# Altium PCB BoostConverter.PcbDoc
Units mil, origin at the board's own origin, x right, y up, seen from the top; angles counter-clockwise.
Board outline 1455 x 1730 mil, 2 copper layers (Top Layer, Bottom Layer); 21 components, 14 nets, 73 pads, 0 vias.
Unrouted connection lines stored in the file: 15.
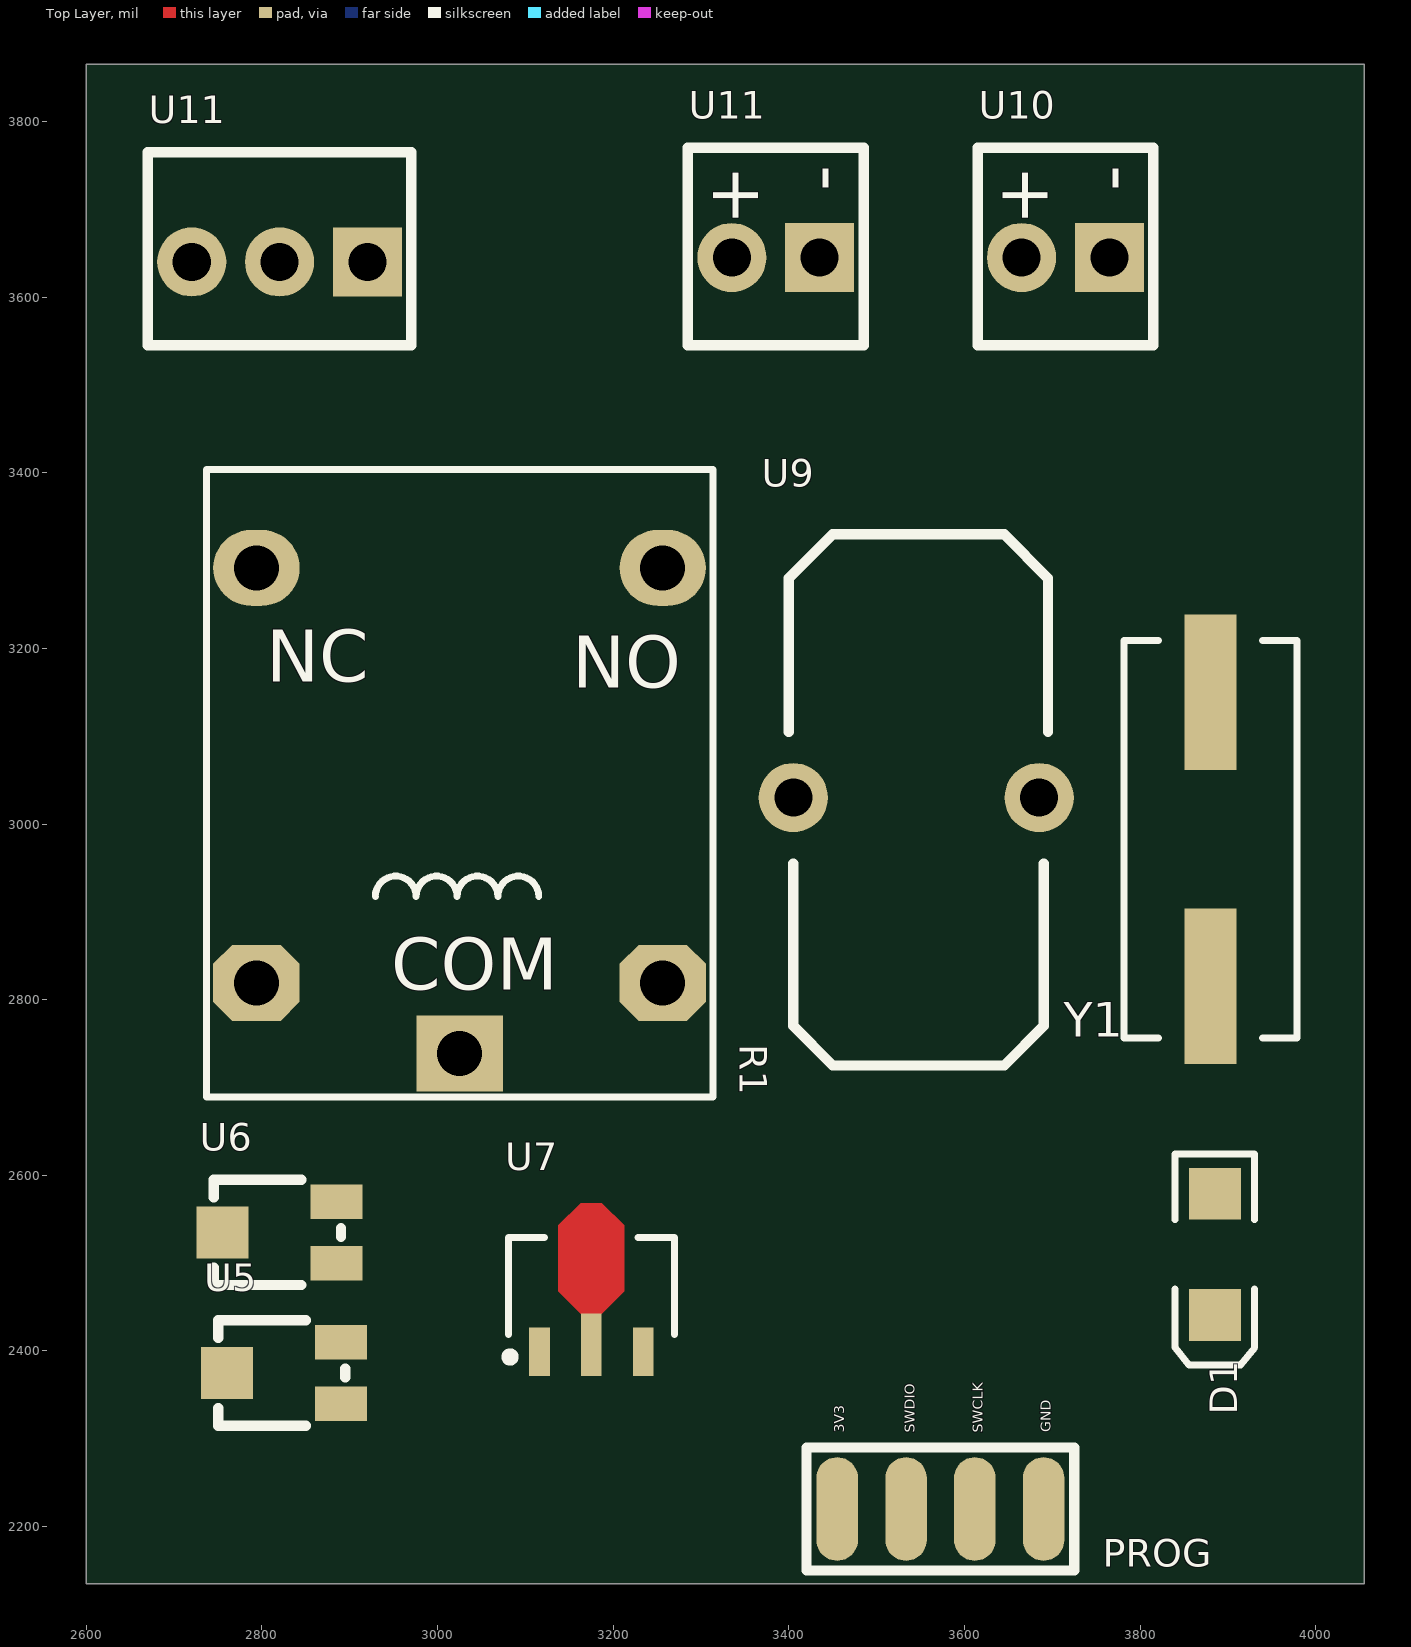
[diagram p0: Top Layer view]
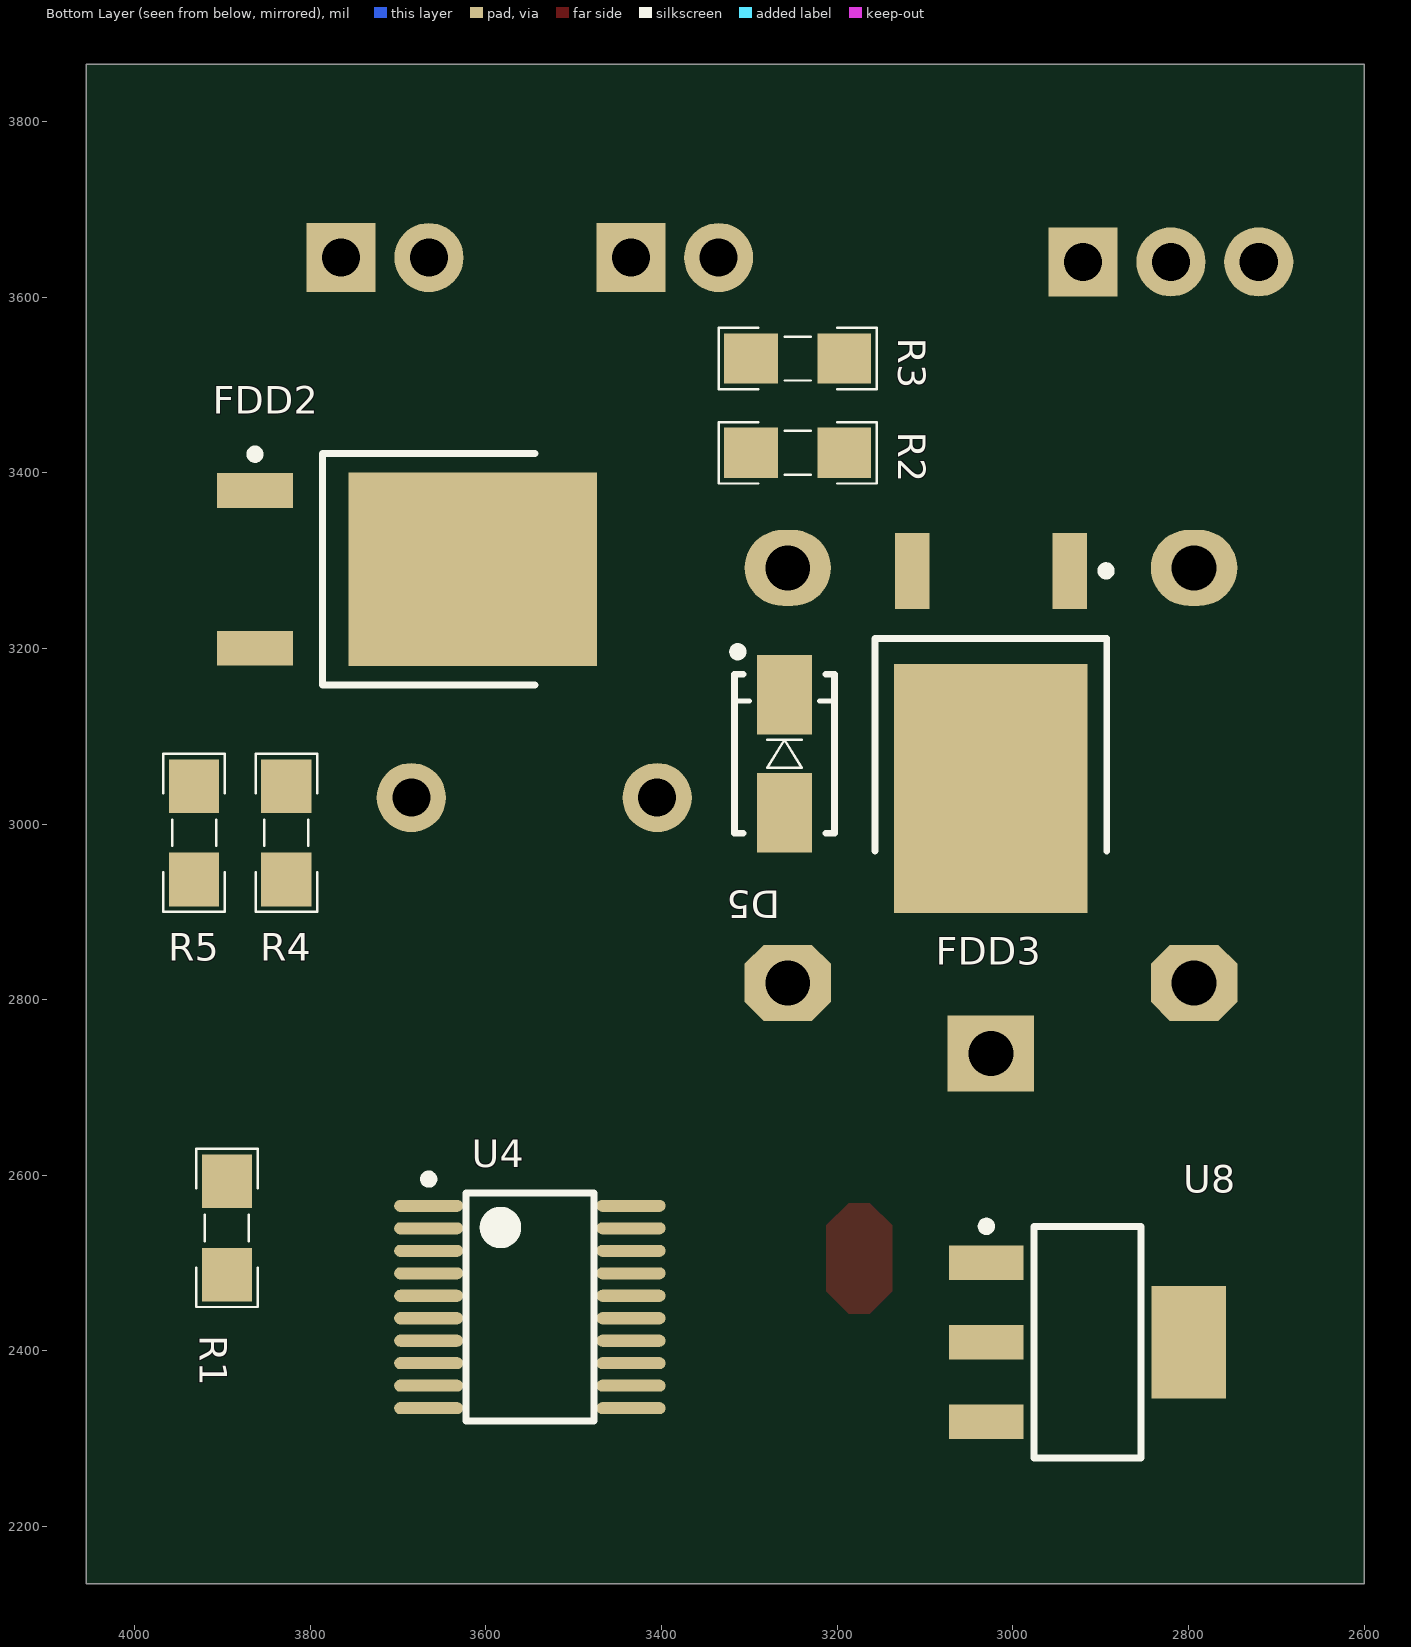
[diagram p1: Bottom Layer view, seen from below]

## Layer stack, top to bottom
Top Solder: solder mask 0.4, Solder Resist, Dk 3.5
Top Layer: signal copper 1.4
Dielectric 1: dielectric 12.6, FR-4, Dk 4.8
Bottom Layer: signal copper 1.4
Bottom Solder: solder mask 0.4, Solder Resist, Dk 3.5

## Board outline
2600,2135 2600,3865 4055,3865 4055,2135

## Design rules (kind name [scope] priority, off if disabled: settings)
Clearance [All] p1: gap=10 ignorepadtopadclearanceinfootprint=FALSE except(0: Arc-Hole Track-Hole SMDPad-Hole THPad-Hole Via-Hole Fill-Hole Poly-Hole Region-Hole Text-Hole)
ComponentClearance [All] p1 off: gap=10 collisioncheckmode=3 verticalgap=10 showdistances=FALSE
Height [All] p1 off: minheight=0 maxheight=1000 prefheight=500
PolygonConnect [All] p1: connectstyle=Relief reliefconductorwidth=10 reliefentries=4 polygonreliefangle="90 Angle" airgapwidth=10
RoutingVias [All] p1: holewidth=28 width=50 viastyle="Through Hole" minholewidth=28 minwidth=50 maxholewidth=28 maxwidth=50
SolderMaskExpansion [All] p1: expansion=4 istentingtop=FALSE
Width [All] p1: maxlimit=10 minlimit=10 preferedwidth=10
28 further rules are at their usual default settings.

## Components (designator, comment, footprint, x,y, rotation, side; value= is the part's Value field where it differs from the comment)
D1 "SMD 1206 LED" "LED 1206" 3885,2510 r270 top (schematic designator D2)
D5 "1n4007" DIOM4629X24N 3260,3080 r90 bottom (schematic designator D3)
FDD2 "Comment" TO252-3M 3689.8,3290 r180 bottom
FDD3 "Comment" TO252-3M 3025,3115 r270 bottom
PROG "Comment" PROGRAMER 3575,2220 r0 top
R1 "1K" RESC3413X04N 3895,2540 r90 bottom (schematic designator R22)
R1 "Comment" "Relay 18.85x15.35x15.70" 3025,3015 r0 top
R2 "Comment" RESC3413X04N 3245,3422.68 r0 bottom
R3 "Comment" RESC3413X04N 3245,3530 r0 bottom
R4 "Comment" RESC3413X04N 3827.32,2990 r270 bottom
R5 "Comment" RESC3413X04N 3932.32,2990 r270 bottom
U4 "Comment" STM32F030F4P6 3550,2450 r180 bottom
U5 "Comment" potentiometer 2820,2375 r90 top
U6 "Comment" potentiometer 2815,2535 r90 top
U7 "Comment" "7805 (SOT-89)" 3175,2470 r90 top
U8 "Comment" AMS1117 2915,2410 r180 bottom
U9 "Comment" inductor 3545,3035 r0 top
U10 "Comment" "H2 MOLEX" 3715,3660 r90 top
U11 "Comment" "H3 MOLEX" 2820,3640 r180 top
U11 "Comment" "H2 MOLEX" 3385,3660 r90 top
Y1 "12 MHz" "Crystal SMD" 3880,2982.68 r90 top

## Footprints (in the part's own frame and the unit in brackets; to place one, negate y for a bottom-side part, rotate by r counter-clockwise, add the part's x,y. Pads: shape width x height; smd on the part's side, far side on the other; paste and mask are expansions set on the pad)
"7805 (SOT-89)" [mm] "SOT89, 3-Leads, Body 4.50x2.45mm, Pitch 1.50mm, Lead Span 4.1mm, IPC Medium Density"
  rect 1.4x0.6 smd: 1(-1.8,1.5) 3(-1.8,-1.5)
  rect 1.8x0.6 smd: 2(-1.6,0)
  Top Layer region: -0.7,0.3 -0.05,0.95 1.85,0.95 2.5,0.3 2.5,-0.3 1.85,-0.95 -0.05,-0.95 -0.7,-0.3
  silkscreen extent -2.08,-2.4 1.5,2.47, body extent -2.27,-2.4 1.78,2.4, height 1.7
AMS1117 [mm] "SOT223, 4-Leads, Body 6.30x7.00mm (avg), Pitch 2.30mm, IPC Medium Density"
  rect 2.15x1 smd: 1(-2.925,2.3) 2(-2.925,0) 3(-2.925,-2.3)
  rect 2.15x3.25 smd: 4(2.925,0)
  silkscreen extent -3.05,-3.35 1.55,3.47, body extent -3.5,-3.35 3.5,3.35, height 1.65
"Crystal SMD" [mm] "DESIGNER ABBAS BASEREH"
  rect 4.5x1.5 smd: 1(-4.25,0) 2(4.25,0)
  silkscreen extent -5.75,-2.5 5.75,2.5, body extent -6.21,-2.25 6.09,2.25, height 5.18
DIOM4629X24N [mm] "Molded Diode, 2-Leads, Body 4/60x2/90mm, IPC Medium Density-Design:Abbas Basereh"
  rect 2.3x1.6 smd: 1(-1.7,0) 2(1.7,0)
  silkscreen extent -2.3,-1.45 3.07,1.48, body extent -2.5,-1.22 2.5,1.48, height 2.2
"H2 MOLEX" [mm]
  round 2 hole 1.1: 1(-0.381,1.27)
  rect 2x2 hole 1.1: 2(-0.381,-1.27)
  silkscreen extent -2.92,-2.54 2.79,2.54, body extent -2.9,-2.54 2.9,2.54, height 11.24
"H3 MOLEX" [mm]
  rect 2x2 hole 1.1: 1(-2.54,0)
  round 2 hole 1.1: 2(0,0) 3(2.54,0)
  silkscreen extent -3.81,-3.18 3.81,2.41, body extent -3.81,-3.31 3.81,2.49, height 11.25
inductor [mm]
  round 2 hole 1.1: 1(-3.556,-0.127) 2(3.556,-0.127)
  silkscreen extent -3.68,-7.87 3.81,7.49, body extent -4.15,-8.42 4.15,8.17, height 16.29
"LED 1206" [mm]
  rect 1.5x1.5 smd: 1(-1.75,0) 2(1.75,0)
  silkscreen extent -2.9,-1.15 3.2,1.15, body extent -1.65,-0.72 1.65,0.73, height 1.36
potentiometer [mm]
  rect 1x1.5 smd: 1(-0.889,-1.778) 3(0.889,-1.778)
  rect 1.5x1.5 smd: 2(0,1.524)
  silkscreen extent -1.52,-1.91 1.52,1.78, body extent -1.55,-1.95 1.55,1.85, height 1.62
PROGRAMER [mm]
  oval 1.2x3 smd: 1(-3.048,0) 2(-1.058,0) 3(0.931,0) 4(2.921,0)
  silkscreen extent -3.94,-1.78 3.81,1.78
"Relay 18.85x15.35x15.70" [mm]
  rect 2.5x2.2 hole 1.3: 1(0,-7.025)
  oval 2.5x2.2 hole 1.3: 2(-5.875,7.025) 3(5.875,7.025)
  oct 2.5x2.2 hole 1.3: 4(-5.875,-4.975) 5(5.875,-4.975)
  silkscreen extent -7.33,-8.27 7.33,9.88, body extent -7.37,-8.72 7.63,9.98, height 15.7
RESC3413X04N [mm] "Chip Resistor, 2-Leads, Body 3/40x1/30mm, IPC Medium Density-Design:Abbas Basereh"
  rect 1.55x1.45 smd: 1(-1.35,0) 2(1.35,0)
  silkscreen extent -2.29,-0.89 2.29,0.89, body extent -1.25,-0.62 1.25,0.62, height 0.79
STM32F030F4P6 [mm] "TSOP, 20-Leads, Body 6.50x4.40mm, Pitch 0.65mm, IPC Medium Density"
  oval 2x0.35 smd: 1(-2.925,2.925) 2(-2.925,2.275) 3(-2.925,1.625) 4(-2.925,0.975) 5(-2.925,0.325) 6(-2.925,-0.325) 7(-2.925,-0.975) 8(-2.925,-1.625) 9(-2.925,-2.275) 10(-2.925,-2.925) 11(2.925,-2.925) 12(2.925,-2.275) 13(2.925,-1.625) 14(2.925,-0.975) 15(2.925,-0.325) 16(2.925,0.325) 17(2.925,0.975) 18(2.925,1.625) 19(2.925,2.275) 20(2.925,2.925)
  silkscreen extent -3.05,-3.3 1.85,3.82, body extent -3.15,-3.3 3.15,3.3, height 1.2
TO252-3M [mm] "D-PAK, 3-Pads, Body 6.2x6.7mm (max), IPC Low Density"
  rect 2.2x1 smd: 1(-4.4,2.28) 3(-4.4,-2.28)
  rect 7.2x5.6 smd: 4(1.9,0)
  silkscreen extent -4.52,-3.35 3.7,3.45, body extent -5.06,-3.27 4.88,3.27, height 2.39

## Part data
D1: library part "LED SMD 1206"
D5: library part "1n4007 SMD M7", "Standard Rectifiers", Manufacturer="DC COMPONENTS", Data=16-12-2016, Designer="Abbas Basereh", Link=http://www.tme.eu/en/details/m7/smd-universal-diodes/dc-components/, Part. No=M7
R1: library part "RES 0805 0.125W", "RES 0805", Data=16-12-2016, Desc.="RES SMD 0805", Designer="Abbas Basereh"
Y1: library part XTAL, "XTAL Crystal", ComponentLink1Description=Datasheet, ComponentLink2Description=Reference, Design Date=2017-1-3, Designer="ABBAS BASEREH", Mounting Technology="Surface Mount\Through-Hole", Status=Unreleased

## Nets (pads, with @x,y where several pads share a name; then routed paths per layer and width w, separated by ;. In a path a pad name is that pad's centre, name@x,y a point inside that pad or via, vN(x,y) a via of type N, cw(c..) or ccw(c..) an arc to the next point about the centre after c; other vN are vias at no path point)
5V: R1.4
BOOST_CTRL: R5.1
GATE: 
GATE_BOOST: FDD2.1 R4.2 R5.2
GATE_RELAY: FDD3.1 R2.2 R3.2
GND: FDD2.3 FDD3.3 R2.1 R4.1 U10.2 U11.2@3435,3645
Inductor: D5.1 FDD2.4 U9.1
M1: 
RELAY: FDD3.4 R1.5
shoot: R3.1
spin: 
VBOOST: D5.2 R1.3 U11.1@3335,3645
VSHOOT: R1.1@3025,2738.43 U10.1
VSS: U9.2
pads on no net: D1.1 D1.2 PROG.1 PROG.2 PROG.3 PROG.4 R1.1@3895,2486.85 R1.2 U4.1 U4.2 U4.3 U4.4 U4.5 U4.6 U4.7 U4.8 U4.9 U4.10 U4.11 U4.12 U4.13 U4.14 U4.15 U4.16 U4.17 U4.18 U4.19 U4.20 U5.1 U5.2 U5.3 U6.1 U6.2 U6.3 U7.1 U7.2 U7.3 U8.1 U8.2 U8.3 U8.4 U11.1@2920,3640 U11.2@2820,3640 U11.3 Y1.1 Y1.2

## Silkscreen, mask and mechanical layers (free items; w line width, h text height)
Mechanical 1:
  the board outline again, w11.81

## Text inside footprints (layer, text, board x,y; h text height)
PROG: Top Overlay "GND" at 3697.99,2307.66 h11.81 r90; Top Overlay "SWCLK" at 3620.54,2306.61 h11.81 r90; Top Overlay "SWDIO" at 3543.03,2306.97 h11.81 r90; Top Overlay "3V3" at 3463.03,2306.97 h11.81 r90
R1: Top Overlay "NC" at 2805,3162 h59.06; Top Overlay "NO" at 3153,3155 h59.06; Top Overlay "COM" at 2947,2811 h59.06
U10: Top Overlay "-" at 3794.99,3750 h60 r90; Top Overlay "+" at 3695,3750 h60 r90
U11: Top Overlay "-" at 3464.99,3750 h60 r90; Top Overlay "+" at 3365,3750 h60 r90